# Altium PCB 音频带按键扩展.pcbdoc
Units mm, origin at the board's own origin, x right, y up, seen from the top; angles counter-clockwise.
Board outline 144.9 x 109.39 mm, 2 copper layers (Top Layer, Bottom Layer); 77 components, 148 nets, 314 pads, 73 vias.
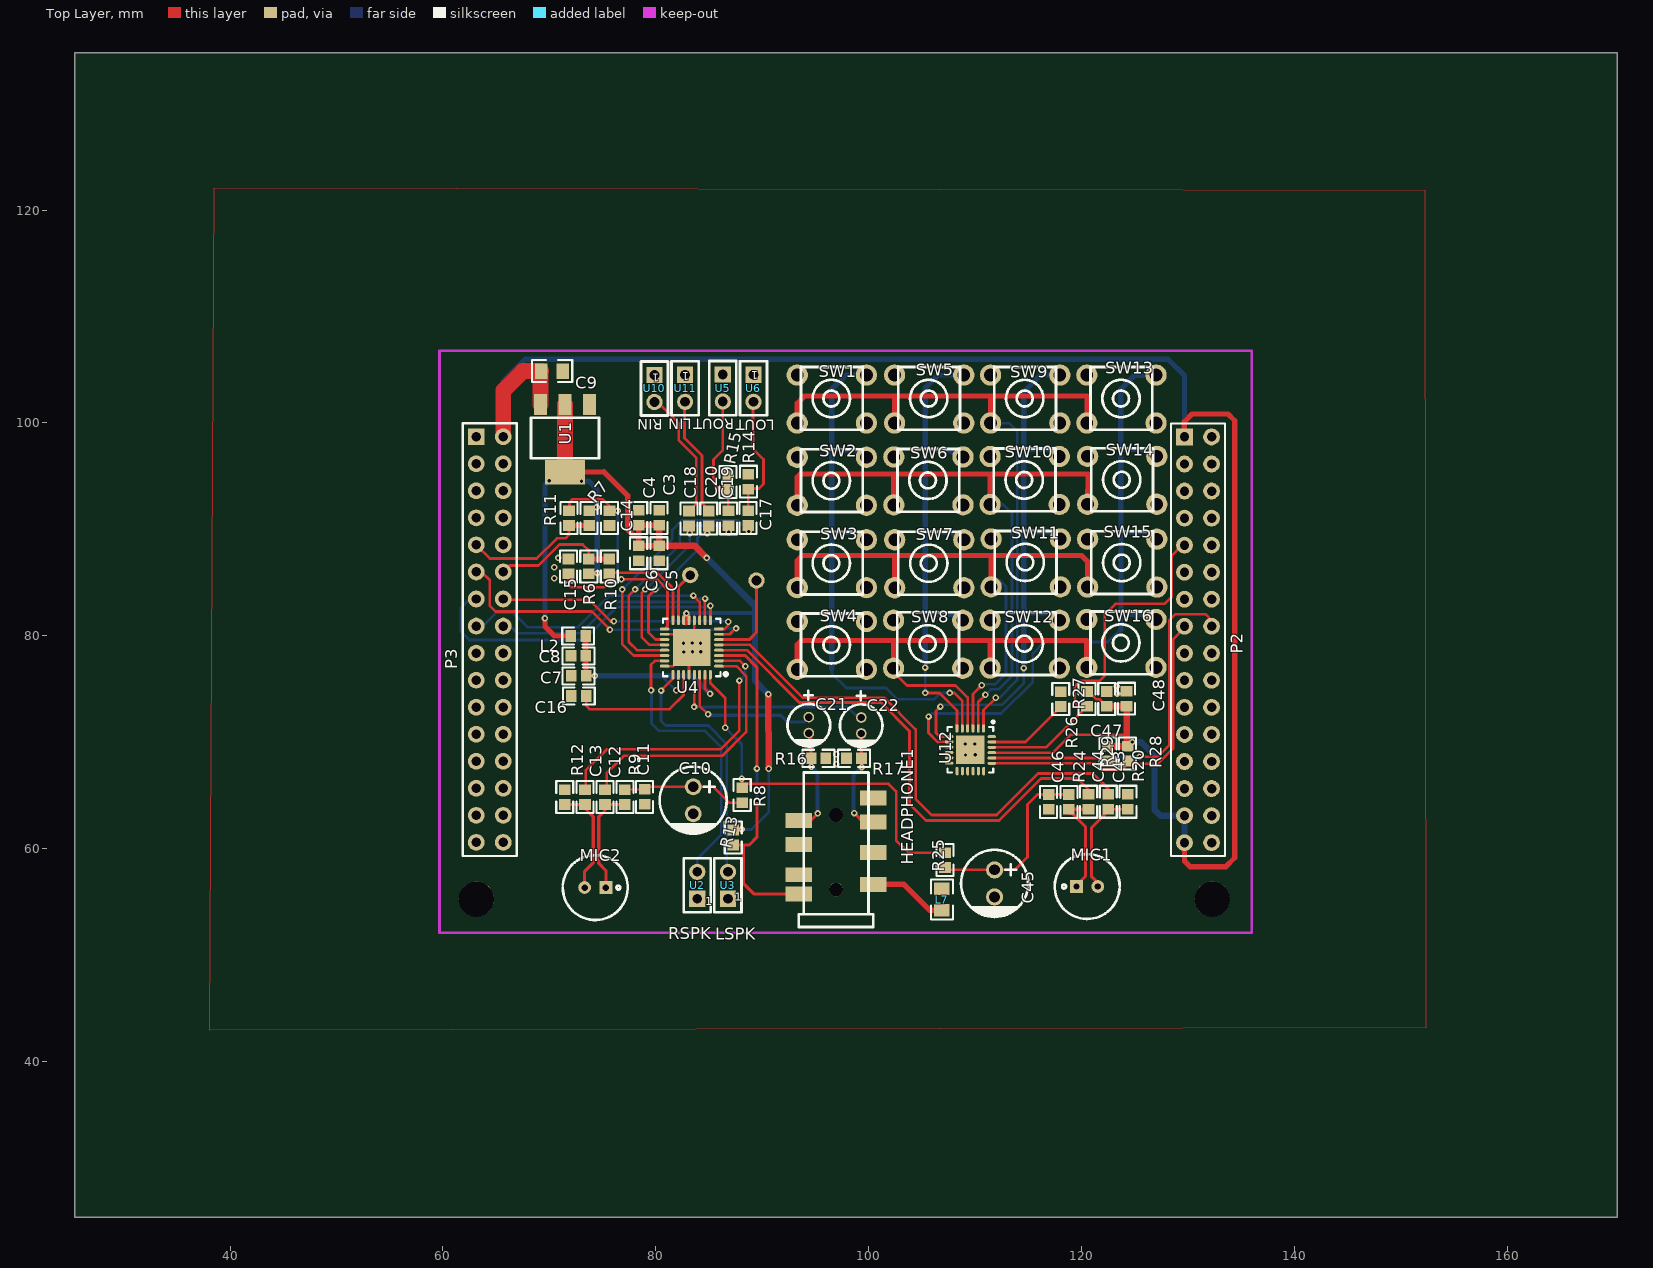
[diagram p0: Top Layer view]
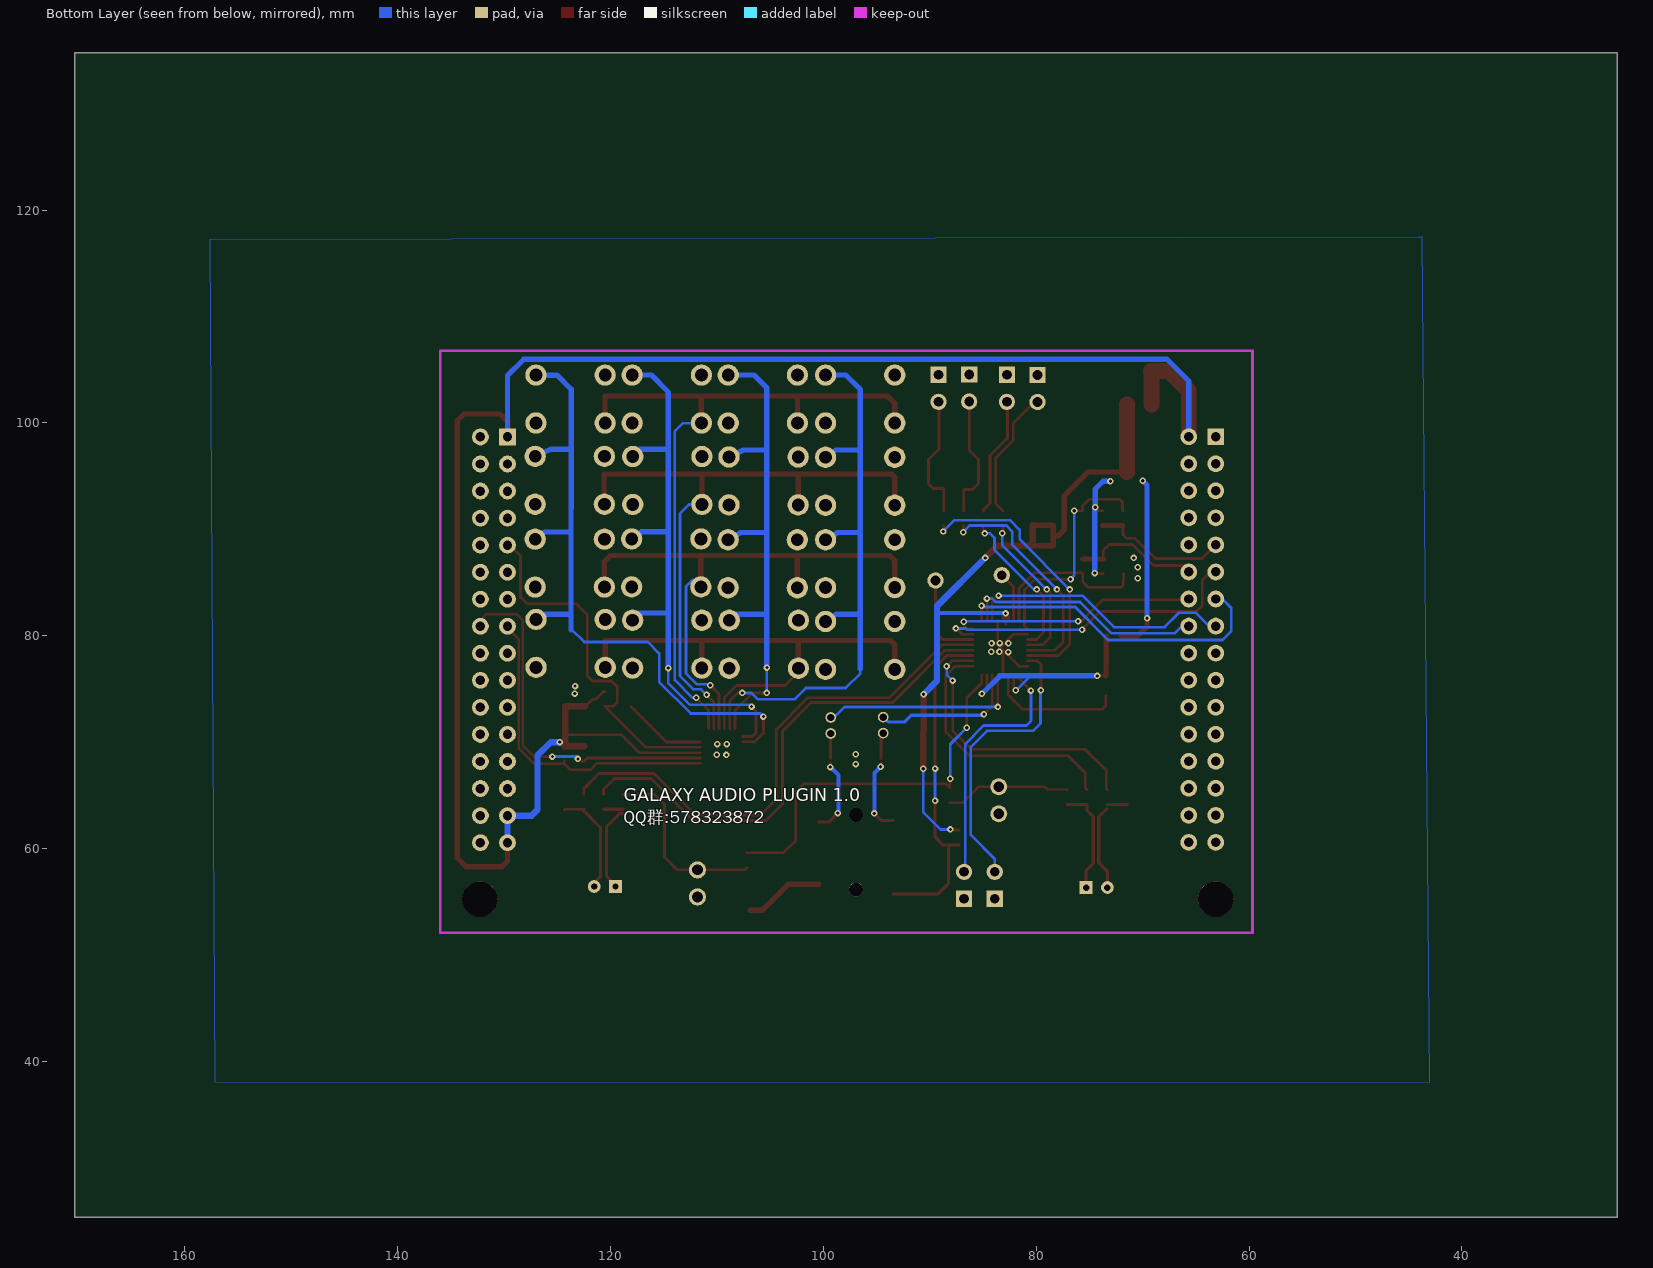
[diagram p1: Bottom Layer view, seen from below]

## Layer stack, top to bottom
Top Layer: signal copper (thickness not stored)
Dielectric: dielectric 0.32, FR-4, Dk 4.8
Bottom Layer: signal copper (thickness not stored)

## Board outline
170.3,25.4 25.4,25.4 25.4,134.787 170.3,134.787

## Components (designator, comment, footprint, x,y, rotation, side; value= is the part's Value field where it differs from the comment)
C3 "10uF" 0603 80.3,91.087 r270 top
C4 "100nF" 0603 78.38,91.087 r90 top
C5 "10uF" 0603 80.3,87.767 r90 top
C6 "100nF" 0603 78.38,87.767 r270 top
C7 "10uF" 0603 72.74,76.247 r0 top
C8 "100nF" 0603 72.72,78.127 r180 top
C9 "10uF" 0805 70.244,104.867 r180 top
C10 "47uF" CAP-TH_BD6.3-P2.50-D1.0-L-FD 83.5,64.567 r270 top
C11 "100nF" 0603 78.94,64.887 r270 top
C12 "1uF" 0603 75.22,64.866 r270 top
C13 "1uF" 0603 73.34,64.866 r270 top
C14 "33pF" 0603 75.64,91.067 r90 top
C15 "33pF" 0603 71.78,86.527 r270 top
C16 "4.7uF" 0603 72.76,74.367 r0 top
C17 "1uF" 0603 88.66,91.067 r90 top
C18 "1uF" 0603 83.1,91.027 r90 top
C19 "1uF" 0603 86.82,91.047 r90 top
C20 "1uF" 0603 84.96,91.027 r90 top
C21 "22uF" CAP-D4.0XF1.5 94.36,71.627 r0 top
C22 "22uF" CAP-D4.0XF1.5 99.28,71.587 r0 top
C43 "1uF" 0603 122.48,64.427 r270 top
C44 "1uF" 0603 120.62,64.427 r270 top
C45 "47uF" CAP-TH_BD6.3-P2.50-D1.0-L-FD 111.8,56.757 r270 top
C46 "100nF" 0603 116.88,64.407 r270 top
C47 "1uF" 0603 122.34,74.087 r270 top
C48 "100nF" 0603 124.2,74.107 r270 top
HEADPHONE1 "PJ-393-7A" PJ-393-7A 96.92,60.268 r180 top
L2 "0Ω" 0603 72.7,79.987 r0 top
L7 "100Ω" 0805 106.86,55.243 r270 top
MIC1 "GMI6050P-42DB" MIC-R6.0-2P-2.0PITCH 120.5,56.467 r0 top
MIC2 "GMI6050P-42DB" MIC-R6.0-2P-2.0PITCH 74.3,56.367 r180 top
P2 "Header-Female-2.54_2x16" HDR-16X2/2.54 132.18,78.367 r270 top
P3 "Header-Female-2.54_2x16" HDR-16X2/2.54 65.66,78.387 r270 top
R6 "4.7K" 0603 73.696,86.527 r270 top
R7 "4.7K" 0603 73.724,91.067 r90 top
R8 "680" 0603 88.1,65.047 r270 top
R9 "2.2K" 0603 77.08,64.866 r270 top
R10 "33" 0603 75.612,86.527 r270 top
R11 "33" 0603 71.84,91.067 r90 top
R12 "2.2K" 0603 71.44,64.867 r90 top
R13 "100K" 0603 87.26,61.067 r90 top
R14 "10K" 0603 88.68,94.486 r270 top
R15 "10K" 0603 86.78,94.447 r270 top
R16 "10K" 0603 95.26,68.507 r180 top
R17 "10K" 0603 98.6,68.507 r0 top
R20 "2.2K" 0603 124.32,64.427 r90 top
R24 "2.2K" 0603 118.78,64.407 r270 top
R25 "680" 0603 107.14,58.947 r270 top
R26 "100K" 0603 118.02,74.067 r270 top
R27 "100K" 0603 120.48,74.087 r270 top
R28 "4.7K" 0603 124.3,68.947 r270 top
R29 "4.7K" 0603 122.44,68.947 r270 top
SW1 "SKHHAMA010" KEY-6.0*6.0-2 96.52,102.247 r0 top
SW2 "SKHHAMA010" KEY-6.0*6.0-2 96.52,94.527 r0 top
SW3 "SKHHAMA010" KEY-6.0*6.0-2 96.52,86.787 r0 top
SW4 "SKHHAMA010" KEY-6.0*6.0-2 96.52,79.107 r0 top
SW5 "SKHHAMA010" KEY-6.0*6.0-2 105.66,102.247 r0 top
SW6 "SKHHAMA010" KEY-6.0*6.0-2 105.59,94.557 r0 top
SW7 "SKHHAMA010" KEY-6.0*6.0-2 105.67,86.777 r0 top
SW8 "SKHHAMA010" KEY-6.0*6.0-2 105.57,79.217 r0 top
SW9 "SKHHAMA010" KEY-6.0*6.0-2 114.68,102.247 r0 top
SW10 "SKHHAMA010" KEY-6.0*6.0-2 114.63,94.596 r0 top
SW11 "SKHHAMA010" KEY-6.0*6.0-2 114.73,86.857 r0 top
SW12 "SKHHAMA010" KEY-6.0*6.0-2 114.64,79.227 r0 top
SW13 "SKHHAMA010" KEY-6.0*6.0-2 123.72,102.247 r0 top
SW14 "SKHHAMA010" KEY-6.0*6.0-2 123.79,94.616 r0 top
SW15 "SKHHAMA010" KEY-6.0*6.0-2 123.79,86.836 r0 top
SW16 "SKHHAMA010" KEY-6.0*6.0-2 123.71,79.297 r0 top
U1 "AMS1117-3.3" SOT-223 71.46,98.567 r270 top
U2 "RSPK" 2PIN 83.88,55.307 r180 top
U3 "LSPK" 2PIN 86.76,55.307 r180 top
U4 "NAU88C22YG" QFN-32_5X5X05P 83.36,78.907 r180 top
U5 "AUX-1" 2PIN 86.28,104.547 r0 top
U6 "AUX-2" 2PIN 89.16,104.527 r0 top
U10 "AUX-2" 2PIN 79.86,104.507 r0 top
U11 "AUX-1" 2PIN 82.74,104.527 r0 top
U12 "SN7326" QFN-24_4X4X05P 109.539,69.307 r270 top

## Footprints (in the part's own frame and the unit in brackets; to place one, negate y for a bottom-side part, rotate by r counter-clockwise, add the part's x,y. Pads: shape width x height; smd on the part's side, far side on the other; paste and mask are expansions set on the pad)
2PIN [mil]
  rect 60x60 hole 36: 1(0,0)
  round 60 hole 36: 2(0,-100)
  silkscreen extent -50,-150 50,50
0603 [mm]
  rect 1x1.1 smd: 1(-0.7,0) 2(0.7,0)
  silkscreen extent -1.5,-0.8 1.5,0.8
0805 [mm]
  rect 1.16x1.45 smd: 1(-1.016,0) 2(1.016,0)
  silkscreen extent -1.9,-1.03 1.87,1.04
CAP-D4.0XF1.5 [mm]
  round 1 hole 0.7: 1(0,0.751) 2(0,-0.751)
  silkscreen extent -2,-2.02 2,3.23
CAP-TH_BD6.3-P2.50-D1.0-L-FD [mm]
  round 1.6 hole 1: 1(-1.27,0) 2(1.27,0)
  silkscreen extent -3.15,-3.15 3.17,3.15
HDR-16X2/2.54 [mil]
  rect 62x62 hole 35: 1(-800,-100)
  round 62 hole 35: 2(-800,0) 3(-700,-100) 4(-700,0) 5(-600,-100) 6(-600,0) 7(-500,-100) 8(-500,0) 9(-400,-100) 10(-400,0) 11(-300,-100) 12(-300,0) 13(-200,-100) 14(-200,0) 15(-100,-100) 16(-100,0) 17(0,-100) 18(0,0) 19(100,-100) 20(100,0) 21(200,-100) 22(200,0) 23(300,-100) 24(300,0) 25(400,-100) 26(400,0) 27(500,-100) 28(500,0) 29(600,-100) 30(600,0) 31(700,-100) 32(700,0)
  silkscreen extent -850,-150 750,50
KEY-6.0*6.0-2 [mm]
  round 2 hole 1.2: 1(3.25,-2.25) 2(-3.25,-2.25) 3(3.25,2.25) 4(-3.25,2.25)
  silkscreen extent -2.9,-2.9 2.9,3
MIC-R6.0-2P-2.0PITCH [mm]
  rect 1.2x1.2 hole 0.6: 1(-1,0)
  round 1.2 hole 0.6: 2(1,0)
  silkscreen extent -3.05,-3.05 3.05,3.05
PJ-393-7A [mm]
  rect 2.5x1.4 smd: 1(-3.5,3.6) 2(3.5,-2.4) 3(-3.5,-2.25) 4(-3.5,0.6) 5(-3.5,-4.5) 6(3.5,-0.15) 7(3.5,2.7) 8(3.5,4.5)
  round 1.3 hole 1.3 unplated: ""(0,4.099) ""(0,-2.899)
  silkscreen extent -3.5,-6.9 3.5,7.6
QFN-24_4X4X05P [mm]
  oval 0.796x0.28 smd: 1(-2,1.232) 2(-2,0.732) 3(-2,0.231) 4(-2,-0.267) 5(-2,-0.767) 6(-2,-1.267) 13(2,-1.257) 14(2,-0.757) 15(2,-0.257) 16(2,0.241) 17(2,0.742) 18(2,1.242)
  oval 0.28x0.796 smd: 7(-1.245,-2) 8(-0.744,-2) 9(-0.244,-2) 10(0.254,-2) 11(0.754,-2) 12(1.255,-2) 19(1.27,2) 20(0.77,2) 21(0.269,2) 22(-0.229,2) 23(-0.729,2) 24(-1.229,2)
  rect 2.68x2.68 smd: 25(0,-0.013)
  silkscreen extent -2.84,-2.16 2.15,2.35
QFN-32_5X5X05P [mm]
  oval 0.896x0.28 smd: 1(-2.55,1.75) 2(-2.55,1.25) 3(-2.55,0.749) 4(-2.55,0.249) 5(-2.55,-0.249) 6(-2.55,-0.749) 7(-2.55,-1.25) 8(-2.55,-1.75) 17(2.55,-1.75) 18(2.55,-1.25) 19(2.55,-0.749) 20(2.55,-0.249) 21(2.55,0.249) 22(2.55,0.749) 23(2.55,1.25) 24(2.55,1.75)
  oval 0.28x0.896 smd: 9(-1.75,-2.55) 10(-1.25,-2.55) 11(-0.749,-2.55) 12(-0.249,-2.55) 13(0.249,-2.55) 14(0.749,-2.55) 15(1.25,-2.55) 16(1.75,-2.55) 25(1.75,2.55) 26(1.25,2.55) 27(0.749,2.55) 28(0.249,2.55) 29(-0.249,2.55) 30(-0.749,2.55) 31(-1.25,2.55) 32(-1.75,2.55)
  rect 3.5x3.5 smd: 33(0,0)
  silkscreen extent -3.35,-2.7 2.7,2.7
SOT-223 [mm]
  rect 2x1.2 smd: 1(-3.175,2.3) 2(-3.175,0) 3(-3.175,-2.3)
  rect 2.3x3.8 smd: 4(3.175,0)
  silkscreen extent -1.93,-3.2 1.87,3.2

## Free pads (board coordinates)
  round 1.524 hole 0.914: 1(83.22,85.707) 2(89.44,85.207)
  round 3.302 hole 3.302 unplated: ""(63.13,55.276) ""(132.24,55.276)

## Via types
v1: diameter 0.61, hole 0.305, Top Layer to Bottom Layer, 73 vias

## Nets (pads, with @x,y where several pads share a name; then routed paths per layer and width w, separated by ;. In a path a pad name is that pad's centre, name@x,y a point inside that pad or via, vN(x,y) a via of type N, cw(c..) or ccw(c..) an arc to the next point about the centre after c; other vN are vias at no path point)
3.3V: P2.3 P3.4
+5V: C9.2 C47.2 C48.2 P2.1 P2.29 P2.31 P3.2 R27.1 R28.1 R29.1 U1.3 U12.21 | length 181.1
  Top Layer w0.25: U12.21 117.28,69.047 118.939,70.706 124.199,70.706 124.199,72.146 ; R27.1 120.64,74.787 121.38,74.047 121.68,74.047 C47.2
  Top Layer w0.5: P2.31 129.64,58.847 130.16,58.327 133.52,58.327 134.36,59.167 134.36,100.207 133.72,100.847 130.36,100.847 129.62,100.107 129.62,98.707 P2.1
  Top Layer w0.6: C47.2 124.199,73.406 124.2,69.747 R28.1 R29.1
  Top Layer w1.5: P3.2 65.66,103.045 67.481,104.867 C9.2 ; U1.3 69.16,104.798 C9.2
  Bottom Layer w0.5: P3.2 65.659,103.927 67.719,105.987 128.1,105.987 129.639,104.447 P2.1
  Bottom Layer w0.6: v1@124.74,70.028 125.581,70.028 126.82,68.786 126.82,63.686 127.379,63.127 P2.29 P2.31
  other v1: 124.74,70.027
AUXO1: C19.2 R15.2 U5.2 | length 12
  Top Layer w0.25: U5.2@86.279,102.327 86.279,97.447 85.401,96.566 85.401,94.308 85.959,93.746 R15.2 86.78,91.787 C19.2
AUXO2: C17.2 R14.2 U6.2 | length 12.1
  Top Layer w0.25: C17.2 R14.2 88.741,93.845 89.681,93.845 90.1,94.267 90.1,96.586 89.119,97.567 U6.2@89.119,102.306
AUXOUT1: C19.1 U4.21 | length 21.7
  Top Layer w0.25: v1(78.04,84.367) 77.46,83.787 77.46,79.407 78.2,78.667 U4.21 ; C19.1@86.821,90.345 v1(86.841,89.746)
  Bottom Layer w0.254: v1(78.04,84.367) 82.241,88.567 82.241,89.827 82.779,90.366 86.239,90.366 v1(86.841,89.746)
AUXOUT2: C17.1 U4.22 | length 25.7
  Top Layer w0.25: v1(76.84,84.367) 76.84,79.207 77.888,78.158 U4.22 ; C17.1 88.66,89.867 v1(88.72,89.807)
  Bottom Layer w0.25: v1(76.84,84.367) 81.54,89.086 81.54,89.947 82.459,90.866 87.659,90.866 v1(88.72,89.807)
C11_1: C10.1 C11.1 R8.2 R9.1 | length 11.7
  Top Layer w0.25: R9.1 C11.1@78.939,65.585 ; C11.1 79.19,65.837 C10.1@83.22,65.837 ; C10.1@83.219,65.837 85.37,65.837 86.859,64.346 R8.2
C13_2: C13.2 MIC2.2 R12.1 | length 10
  Top Layer w0.3: R12.1 C13.2 ; MIC2.2 73.3,57.887 74.121,58.707 74.121,63.01 C13.2@73.341,63.79
C21_2: C21.2 HEADPHONE1.2 R16.2 | length 9.5
  Top Layer w0.3: HEADPHONE1.2 94.541,62.668 v1(95.2,63.327) ; C21.2 94.56,70.676 R16.2 ; R16.2@94.56,68.054 94.56,67.746 v1(94.6,67.707)
  Bottom Layer w0.4: v1(94.6,67.707) 95.18,67.127 95.18,63.347 v1(95.2,63.327)
C22_2: C22.2 HEADPHONE1.3 R17.2 | length 9.5
  Top Layer w0.3: v1(98.62,63.367) 99.469,62.517 HEADPHONE1.3 ; C22.2 99.3,70.816 R17.2 ; R17.2@99.299,68.054 v1(99.32,67.687)
  Bottom Layer w0.4: v1(98.62,63.367) 98.56,63.427 98.56,66.927 v1(99.32,67.687)
C44_2: C44.2 MIC1.1 R24.2 | length 9.9
  Top Layer w0.3: R24.2@118.779,63.327 119.079,63.327 120.341,62.068 120.341,57.447 119.5,56.607 MIC1.1 ; R24.2 118.8,63.727 C44.2
GND: C3.1 C4.2 C5.1 C6.2 C7.1 C8.2 C9.1 C10.2 C11.2 C14.1 C15.1 C16.1 C45.2 C46.2 C47.1 C48.1 L7.1 P2.2 P2.4 P2.32 P3.1 P3.31 R12.2 R14.1 R15.1 R16.1 R17.1 R20.2 R26.1 U1.1 U2.1 U3.1 U4.12 U4.18 U4.24 U4.28 U4.33 U5.1 U6.1 U10.1 U11.1 U12.9 U12.18 U12.24 U12.25 | length 11.6
  Top Layer w0.25: U4.24 81.61,77.157 U4.33 ; U4.18 82.11,80.156 U4.33 ; U4.28 83.111,78.658 U4.33 ; U4.12 83.609,79.156 U4.33
  other v1: 96.94,67.967 109.08,68.827 109.98,68.846 96.94,68.887 109.04,69.846 109.94,69.846 123.32,74.587 123.3,75.287 82.62,78.486 83.44,78.507 84.22,78.507 82.6,79.306 84.18,79.306 83.42,79.326 70.44,85.427 70.46,86.447 70.82,87.326
GPIO1: pad.1 U4.15 | length 4.7
  Top Layer w0.3: U4.15 82.11,84.597 pad.1
GPIO2: HEADPHONE1.8 R13.1 U4.3 | length 31.8
  Top Layer w0.3: U4.3 88.389,78.157 89.48,77.067 v1(89.48,67.546) ; R13.1 88.76,60.367 89.48,61.087 v1(89.48,64.527) ; 88.229,60.367 88.229,56.737 89.199,55.768 HEADPHONE1.8
  Bottom Layer w0.3: v1(89.48,64.527) 89.48,64.539 v1(89.48,64.527) v1(89.48,67.546)
GPIO3: pad.2 U4.6 | length 8.7
  Top Layer w0.3: U4.6 88.769,79.657 89.44,80.328 pad.2
HEADPHONE1_4: HEADPHONE1.4
HEADPHONE1_5: HEADPHONE1.5
HEADPHONE1_6: HEADPHONE1.6
HEADPHONE1_7: HEADPHONE1.7
I2S_BCLK: P3.14 U4.8 | length 23.4
  Top Layer w0.254: P3.14 65.721,83.406 73.699,83.406 75.721,81.387 v1(76.06,81.386) ; U4.8@85.871,80.658 86.432,80.658 86.8,81.026 v1(86.8,81.326)
  Bottom Layer w0.254: v1(76.06,81.386) 86.74,81.387 v1(86.8,81.326)
I2S_DI: P3.13 U4.9 | length 30.5
  Top Layer w0.25: U4.9 85.12,81.467 v1(85.12,82.827)
  Bottom Layer w0.254: P3.13 62.5,83.467 61.68,82.647 61.68,80.427 62.48,79.627 73.239,79.627 76.32,82.708 84.999,82.708 v1@85.119,82.827
I2S_DO: P3.16 U4.10 | length 22.7
  Top Layer w0.25: U4.10 84.58,81.486 84.58,83.467 v1(84.62,83.507)
  Bottom Layer w0.254: P3.16 66.3,80.927 66.981,80.246 72.919,80.246 75.86,83.188 83.8,83.188 84.12,83.508 v1(84.62,83.507)
I2S_I2C_SCL: C15.2 R10.2 U4.16 | length 15.6
  Top Layer w0.254: C15.2@71.779,85.827 71.799,84.788 72.02,84.567 75.101,84.567 75.612,85.077 R10.2 75.711,85.926 80.161,85.926 81.611,84.475 U4.16
I2S_I2C_SDA: C14.2 R11.2 U4.17 | length 21.3
  Top Layer w0.25: v1(76.76,85.326) 80.08,85.327 81.08,84.327 81.08,80.927 U4.17
  Top Layer w0.254: R11.2 71.88,91.807 71.88,92.547 72.18,92.847 75,92.847 75.64,92.206 75.64,91.766 v1@76.42,91.766
  Bottom Layer w0.254: v1(76.42,91.767) 76.42,85.666 v1(76.76,85.326)
I2S_LRCK: P3.11 U4.7 | length 29.9
  Top Layer w0.254: P3.11 63.62,86.007 64.4,85.227 64.4,82.827 64.941,82.286 73.981,82.286 v1(75.68,80.587) ; U4.7 86.93,80.157 87.479,80.707 v1(87.52,80.706)
  Bottom Layer w0.254: v1(75.68,80.587) 86.46,80.587 86.58,80.707 v1(87.52,80.706)
I2S_MCLK: P3.15 U4.11 | length 25.3
  Top Layer w0.25: v1(83.52,83.786) 84.109,83.197 U4.11
  Bottom Layer w0.254: P3.15 63.74,80.927 64.979,82.167 66.6,82.167 67.941,80.825 72.678,80.825 75.639,83.787 v1(83.52,83.786)
INTB: P2.9 R27.2 U12.22 | length 34.7
  Top Layer w0.25: U12.22 116.628,69.535 R27.2 ; R27.2 119.738,73.386 119.319,73.807 119.319,75.227 119.86,75.766 121.64,75.766 122.159,76.286 122.159,82.006 123.159,83.007 127.78,83.007 128.42,83.647 128.42,87.506 129.438,88.527 P2.9
L7_2: HEADPHONE1.1 L7.2 | length 7.5
  Top Layer w0.5: HEADPHONE1.1 103.28,56.668 105.721,54.227 L7.2
LAUXI: C20.2 U11.2 | length 11.5
  Top Layer w0.25: U11.2@82.68,102.327 82.68,98.567 84.319,96.927 84.319,92.466 84.961,91.826 C20.2
LAUXIN: C20.1 U4.19 | length 14.7
  Top Layer w0.25: v1(79.94,84.367) 79.3,83.727 79.3,80.327 79.97,79.657 U4.19 ; v1(84.82,89.626) 84.96,89.767 C20.1
  Bottom Layer w0.25: v1(79.94,84.367) 80.18,84.367 83.9,88.087 83.9,89.207 84.32,89.627 v1@84.96,89.627
LHP: C21.1 U4.30 | length 14
  Top Layer w0.25: U4.30 84.11,73.436 v1(84.9,72.647)
  Bottom Layer w0.3: v1(84.9,72.647) 85.001,72.547 91.719,72.547 92.339,71.928 93.901,71.928 C21.1@94.351,72.377
LSPKOUT: U3.2 U4.25 | length 23.9
  Top Layer w0.25: v1(80.48,74.866) 81.61,75.997 U4.25
  Bottom Layer w0.25: v1(80.48,74.866) 80.481,72.027 80.92,71.587 84.921,71.587 86.64,69.868 86.64,57.965 U3.2
MICBIAS: R8.1 R25.1 U4.32 | length 36.4
  Top Layer w0.25: U4.32 85.111,75.555 86.52,74.146 v1(86.52,71.367) ; v1(88.06,66.587) 88.1,66.547 R8.1 ; R8.1 88.459,66.106 101.86,66.106 102.561,65.408 102.561,60.787 103.699,59.647 R25.1
  Bottom Layer w0.25: v1(86.52,71.367) 88.06,69.826 v1(88.06,66.587)
MICN: C13.1 U4.2 | length 26.8
  Top Layer w0.25: C13.1 73.4,65.626 73.4,67.367 75.38,69.347 86.06,69.347 87.84,71.127 v1(87.84,75.807) ; U4.2 87.9,77.666 v1(88.4,77.147)
  Bottom Layer w0.25: v1(87.84,75.807) 88.4,76.367 v1(88.4,77.147)
MICP: C12.1 U4.1 | length 24.5
  Top Layer w0.25: C12.1 75.38,65.727 75.38,67.127 77,68.747 86.26,68.747 88.48,70.967 88.48,76.227 87.55,77.157 U4.1
OD0: SW1.3 SW2.3 SW3.3 SW4.3 U12.5 | length 57.2
  Top Layer w0.25: v1(107.6,74.647) 108.021,74.647 108.771,73.896 U12.5
  Bottom Layer w0.25: 96.5,76.927 96.5,76.487 97.881,75.107 101.62,75.107 102.68,74.046 106.119,74.046 106.719,74.646 v1(107.6,74.647)
  Bottom Layer w0.5: 96.5,76.927 96.5,103.127 97.87,104.496 SW1.3@99.77,104.496 ; 96.518,82.037 98.779,82.037 SW4.3 ; 96.544,89.715 98.611,89.715 SW3.3 ; 96.569,97.457 98.814,97.457 SW2.3
OD1: SW5.3 SW6.3 SW7.3 SW8.3 U12.6 | length 49.4
  Top Layer w0.25: v1(105.3,74.647) 106.62,74.647 108.271,72.995 U12.6
  Bottom Layer w0.25: v1@105.279,77.026 v1@105.299,74.646
  Bottom Layer w0.5: v1@105.279,77.026 105.279,103.285 106.49,104.496 SW5.3 ; 105.289,82.037 108.309,82.037 SW8.3 ; 105.307,89.715 107.704,89.715 SW7.3 ; 105.322,97.457 107.476,97.457 SW6.3
  other v1: 105.28,77.026
OD2: SW9.3 SW10.3 SW11.3 SW12.3 U12.7 | length 54.4
  Top Layer w0.25: v1@106.72,73.367 106.3,72.947 106.3,70.907 106.655,70.551 U12.7
  Bottom Layer w0.25: v1@106.72,73.367 106.88,73.527 112.52,73.527 114.54,75.547 v1(114.54,76.987)
  Bottom Layer w0.5: v1(114.54,76.987) 114.54,102.906 116.13,104.496 SW9.3 ; 114.551,82.157 SW12.3@117.89,82.157 ; 114.567,89.787 117.087,89.787 SW11.3 ; 114.583,97.526 SW10.3@117.88,97.526
  other v1: 106.72,73.367
OD3: SW13.3 SW14.3 SW15.3 SW16.3 U12.8 | length 63.6
  Top Layer w0.254: v1(105.6,72.427) 105.6,70.907 106.46,70.047 U12.8
  Bottom Layer w0.254: v1(105.6,72.427) 105.88,72.707 112.42,72.707 115.4,75.687 115.4,78.367 116.46,79.427 122.423,79.427 123.667,80.67
  Bottom Layer w0.5: 123.67,82.047 SW16.3@126.92,82.047 ; 123.68,80.567 123.661,103.167 124.989,104.496 SW13.3 ; 123.686,89.756 126.127,89.756 SW15.3 ; 123.704,97.536 125.543,97.536 SW14.3
OD4: U12.10
OD5: U12.11
OD6: U12.12
OD7: U12.13
OTH3.3V: C3.2 C4.1 C5.2 C6.1 L2.1 R6.2 R7.2 R13.2 U1.2 U1.4 U4.13 U4.14 | length 98
  Top Layer w0.25: U4.14 U4.13 ; 82.86,81.087 82.86,81.459 v1(82.86,82.106)
  Top Layer w0.254: R6.2 74.4,85.827 v1@74.48,85.907 ; R7.2@73.724,91.766 74.12,91.766 v1@74.44,92.087
  Top Layer w0.3: U4.14 82.611,81.857 v1(82.86,82.106) 83.111,81.855 U4.13 ; R13.2 v1@87.98,61.767 ; v1@87.98,61.767 v1(88.04,61.827) v1@87.98,61.767
  Top Layer w0.5: v1@69.579,81.666 69.579,80.866 70.46,79.987 L2.1 ; U1.4@71.459,95.392 75.119,95.408 77.339,93.188 77.339,89.987 77.928,89.4 78.38,89.4 ; C6.1 C5.2 ; C6.1 C4.1 ; C4.1 C3.2
  Top Layer w0.6: C3.2 C5.2 83.62,88.486 v1(84.78,87.326) ; v1@90.559,74.547 v1@90.6,67.546
  Top Layer w1.5: U1.4 U1.2
  Bottom Layer w0.25: v1(88.04,61.827) 88.96,61.827 90.6,63.466 v1(90.6,67.526)
  Bottom Layer w0.4: v1(82.86,82.106) 82.881,82.128 89.22,82.147
  Bottom Layer w0.5: v1(69.58,81.667) 69.58,94.167 v1(69.98,94.566) ; v1(73.02,94.526) 73.7,94.527 74.44,93.787 74.44,92.087 74.48,92.047 v1@74.48,85.907
  Bottom Layer w0.6: v1@84.78,87.327 89.3,82.807 89.3,75.786 v1@90.56,74.526
  other v1: 90.56,74.526 74.48,85.907 74.44,92.086
PA0: P3.9 R7.1 R11.1 | length 12.9
  Top Layer w0.254: P3.9 64.4,87.267 68.799,87.267 70.699,89.167 71.499,89.167 71.84,89.507 R11.1
  Top Layer w0.5: R11.1 R7.1
PA1: P3.12 R6.1 R10.1 | length 12
  Top Layer w0.254: P3.12 66.259,86.606 68.959,86.606 70.94,88.588 73.12,88.588 73.696,88.011 R6.1
  Top Layer w0.5: R6.1 R10.1
PA7: P3.18
PA8: P3.17
PA9: P3.20
PA10: P3.19
PA11: P3.22
PA12: P3.21
PB0: P3.32
PB1: P2.26
PB2: P2.24
PB3: P2.23
PB5: P2.25
PB7: P2.28
PB8: P2.27
PB13: P2.10
PC0: P2.30
PD8: P2.21
PD9: P2.22
PD10: P2.19
PD11: P2.20
PD12: P2.17
PD13: P2.18
PE10: P3.8
PE12: P3.10
PF7: P2.8
PF8: P2.7
PF9: P2.6
PF10: P2.5
PG0: P3.29
PG1: P3.30
PG3: P3.27
PG5: P3.28
PG6: P3.25
PG7: P3.26
PG8: P3.23
PG9: P3.24
PG11: P2.13
PG12: P2.14
PG13: P2.11
PG14: P2.12
PP0: SW1.2 SW5.2 SW9.2 SW13.2 U12.1 | length 69.4
  Top Layer w0.25: U12.1 110.77,73.037 v1(111.92,74.187)
  Top Layer w0.5: SW1.2@93.27,99.997 93.27,101.836 93.968,102.535 94.68,102.527 ; 94.161,102.527 120.48,102.527 ; SW5.2 102.411,102.316 ; SW9.2 111.44,102.467 ; SW13.2@120.478,99.964 120.48,102.507
  Bottom Layer w0.25: SW9.2@111.43,99.987 113.161,99.987 113.92,99.228 113.92,75.847 112.259,74.186 v1(111.92,74.187)
PP1: SW2.2 SW6.2 SW10.2 SW14.2 U12.2 | length 64.3
  Top Layer w0.25: U12.2 110.27,73.797 v1(110.94,74.467)
  Top Layer w0.5: SW2.2 93.27,94.917 93.56,95.207 120.58,95.207 SW14.2 ; SW6.2 102.34,95.067 102.48,95.207 103.145,95.207 ; SW10.2 111.38,95.067 111.519,95.207 112.058,95.207
  Bottom Layer w0.25: v1(110.94,74.467) 111.46,74.987 112.18,74.987 113.44,76.246 113.44,91.487 112.58,92.347 SW10.2
PP2: SW3.2 SW7.2 SW11.2 SW15.2 U12.3 | length 56.6
  Top Layer w0.25: U12.3 109.769,74.536 v1(110.6,75.367)
  Top Layer w0.5: SW3.2 93.27,87.077 93.74,87.547 119.983,87.546 120.54,86.987 SW15.2 ; SW7.2 102.419,87.366 102.599,87.546 103.148,87.546 ; SW11.2 111.479,87.386 111.639,87.546 111.931,87.546
  Bottom Layer w0.25: v1(110.6,75.367) 110.7,75.467 111.88,75.467 112.881,76.468 112.881,84.628 112.221,85.286 SW11.2@111.479,85.286
PP3: SW4.2 SW8.2 SW12.2 SW16.2 U12.4 | length 51
  Top Layer w0.25: SW8.2@102.32,77.648 102.32,76.607 103.579,75.347 108.139,75.347 109.272,74.214 U12.4
  Top Layer w0.5: SW4.2 93.27,79.177 93.658,79.566 94.43,79.566 ; 93.64,79.567 120.166,79.567 120.46,79.567 ; SW8.2 102.32,79.566 103.01,79.566 ; SW12.2 111.39,79.566 112.287,79.566 ; 120.46,79.567 120.46,79.103 SW16.2@120.46,77.727
PP4: U12.14
PP5: U12.15
PP6: U12.16
PP7: U12.17
R9_2: C12.2 MIC2.1 R9.2 | length 10.2
  Top Layer w0.25: C12.2 R9.2
  Top Layer w0.3: C12.2 75.22,63.607 74.621,63.007 74.621,58.646 75.299,57.968 MIC2.1@75.299,56.368
R20_1: C43.2 MIC1.2 R20.1 | length 10
  Top Layer w0.25: C43.2 124.26,63.727 R20.1@124.301,63.686
  Top Layer w0.3: MIC1.2@121.499,56.467 121.499,56.807 120.92,57.386 120.92,62.007 122.48,63.566 C43.2
R24_1: C45.1 C46.1 R24.1 R25.2 | length 17.6
  Top Layer w0.25: R25.2 107.36,58.027 C45.1 113.699,58.026 114.9,59.228 114.9,64.166 115.84,65.105 C46.1@116.879,65.105 ; C46.1 R24.1
RAUXI: C18.2 U10.2 | length 12.5
  Top Layer w0.25: U10.2@79.861,102.327 79.861,102.266 82.139,99.987 82.139,98.387 83.8,96.726 83.8,92.426 C18.2@83.099,91.727
RAUXIN: C18.1 U4.20 | length 14.8
  Top Layer w0.25: v1(79,84.367) 78.66,84.027 78.66,79.907 79.41,79.157 U4.20 ; C18.1@83.1,90.327 83.1,89.727 v1(83.18,89.646)
  Bottom Layer w0.25: v1(79,84.367) 83.18,88.547 v1(83.18,89.646)
RHP: C22.1 U4.29 | length 18.9
  Top Layer w0.25: v1(83.58,73.327) 83.61,73.357 U4.29
  Bottom Layer w0.3: v1@83.58,73.327 97.991,73.327 C22.1@98.98,72.337
RMICN: C43.1 U4.5 | length 49.7
  Top Layer w0.25: U4.5 88.831,79.157 93.782,74.206 101.419,74.206 104.399,71.227 104.399,64.686 105.9,63.188 111.999,63.188 115.9,67.086 121.038,67.086 122.479,65.646 C43.1
RMICP: C44.1 U4.4 | length 47.8
  Top Layer w0.25: U4.4 88.549,78.659 93.459,73.746 101.12,73.746 103.82,71.046 103.82,64.206 105.359,62.667 112.24,62.667 116.179,66.606 119.578,66.606 120.619,65.568 C44.1
RSPKOUT: U2.2 U4.23 | length 27.1
  Top Layer w0.25: v1(79.54,74.887) 79.54,77.307 79.89,77.657 U4.23
  Bottom Layer w0.25: v1(79.54,74.887) 79.579,74.846 79.579,71.788 80.28,71.087 84.621,71.087 86.119,69.586 86.119,61.288 83.879,59.047 U2.2@83.879,57.846
S$21: 
S$23: 
S$67: 
S$69: 
S$2331: 
SCL_KB: P2.15 R28.2 U12.19 | length 30.3
  Top Layer w0.25: U12.19 121.22,68.047 121.819,67.447 123.78,67.447 124.301,67.965 R28.2 ; R28.2@124.301,68.077 124.372,68.006 127.161,68.006 128.581,69.426 128.581,79.667 129.64,80.726 P2.15
SDA_KB: P2.16 R29.2 U12.20 | length 34.2
  Top Layer w0.25: U12.20 122.15,68.537 R29.2
  Top Layer w0.254: R29.2 122.82,68.247 v1@123.02,68.447 ; v1(125.42,68.667) 127.12,68.646 128.2,69.726 128.2,81.448 128.799,82.047 131.601,82.047 132.18,81.466 P2.16
  Bottom Layer w0.254: v1@123.02,68.447 123.24,68.667 v1(125.42,68.667)
  other v1: 123.02,68.447
SP_VD33: C7.2 C8.1 L2.2 U4.26 U4.31 | length 22.3
  Top Layer w0.25: C7.2 v1(74.26,76.246) ; v1(81.9,74.887) 82.11,75.097 U4.26 ; U4.31 84.61,75.037 v1(85.08,74.567)
  Top Layer w0.5: L2.2 73.4,78.147 C8.1@73.44,78.107 ; C8.1@73.419,78.125 C7.2
  Bottom Layer w0.25: 79.851,76.247 80.54,76.247 v1(81.9,74.887)
  Bottom Layer w0.5: v1(74.26,76.246) 83.4,76.247 v1(85.08,74.567)
SW1_1: SW1.1
SW1_4: SW1.4
SW2_1: SW2.1
SW2_4: SW2.4
SW3_1: SW3.1
SW3_4: SW3.4
SW4_1: SW4.1
SW4_4: SW4.4
SW5_1: SW5.1
SW5_4: SW5.4
SW6_1: SW6.1
SW6_4: SW6.4
SW7_1: SW7.1
SW7_4: SW7.4
SW8_1: SW8.1
SW8_4: SW8.4
SW9_1: SW9.1
SW9_4: SW9.4
SW10_1: SW10.1
SW10_4: SW10.4
SW11_1: SW11.1
SW11_4: SW11.4
SW12_1: SW12.1
SW12_4: SW12.4
SW13_1: SW13.1
SW13_4: SW13.4
SW14_1: SW14.1
SW14_4: SW14.4
SW15_1: SW15.1
SW15_4: SW15.4
SW16_1: SW16.1
SW16_4: SW16.4
U4_27: C16.2 U4.27 | length 12.7
  Top Layer w0.25: C16.2 73.46,73.426 73.76,73.127 81.281,73.127 82.612,74.458 U4.27
U12_23: R26.2 U12.23 | length 7.9
  Top Layer w0.25: U12.23 114.689,70.036 R26.2
USB0_DM: P3.6
USB0_DP: P3.3
USB1_DM: P3.7
USB1_DP: P3.5
pads on no net: HEADPHONE1.

## Polygon pours and split planes (outlines as drawn)
GND on Bottom Layer (solid): 44.05,117.437 157.6,117.187 157.15,38.137 43.039,38.1 43.75,117.437
GND on Top Layer (solid): 38.5,122.087 152.188,121.85 152.3,43.187 38.1,42.987 38.5,122.087

## Silkscreen, mask and mechanical layers (free items; w line width, h text height)
Top Overlay:
  text "LIN" at 83.343,100.379 h1 r180
  text "ROUT" at 87.376,100.378 h1 r180
  text "RIN" at 80.632,100.336 h1 r180
  text "LOUT" at 91.164,100.319 h1 r180
Bottom Overlay:
  text "GALAXY AUDIO PLUGIN 1.0 / QQ群:578323872" at 118.74,62.006 h2.03
Document:
  lines w0.003: 97.824,80.068 97.875,80.119

## Text inside footprints (layer, text, board x,y; h text height)
U2: Top Overlay "1" at 84.612,54.713 h0.76
U3: Top Overlay "1" at 87.393,55.113 h0.76
U5: Top Overlay "。" at 86.507,95.799 h0.76 r248
U6: Top Overlay "1" at 89.62,104.871 h0.76 r180
U10: Top Overlay "1" at 80.32,104.611 h0.76 r180
U11: Top Overlay "1" at 83.14,104.751 h0.76 r180